# Altium PCB Avalon_PDU.PcbDoc
Units mil, origin at the board's own origin, x right, y up, seen from the top; angles counter-clockwise.
Board outline 3149.61 x 2992.13 mil, 2 copper layers (Top Layer, Bottom Layer); 22 components, 7 nets, 140 pads, 32 vias.
Unrouted connection lines stored in the file: 2.
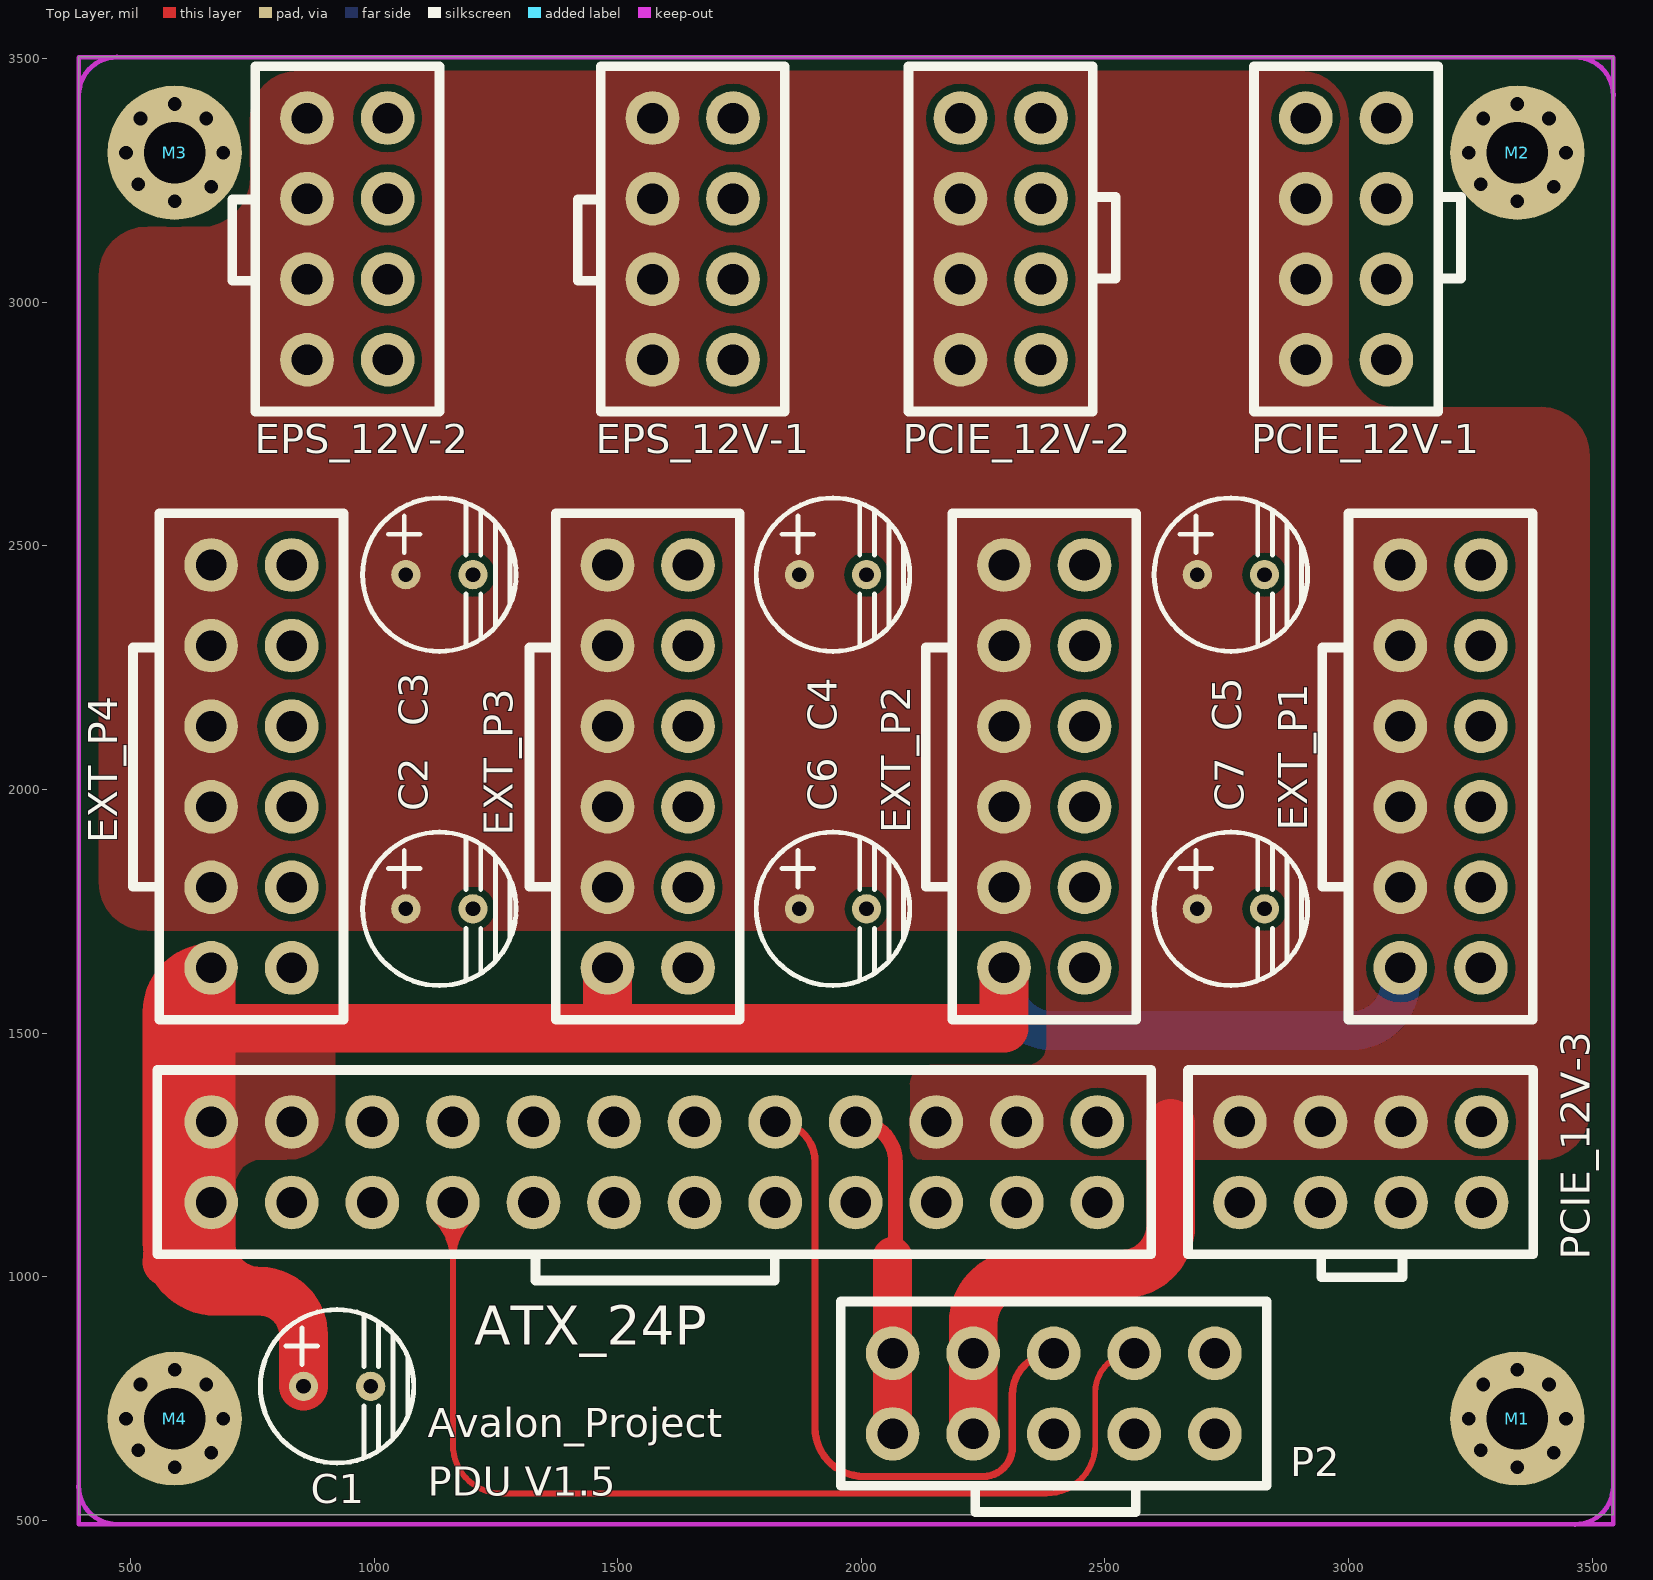
[diagram p0: Top Layer view]
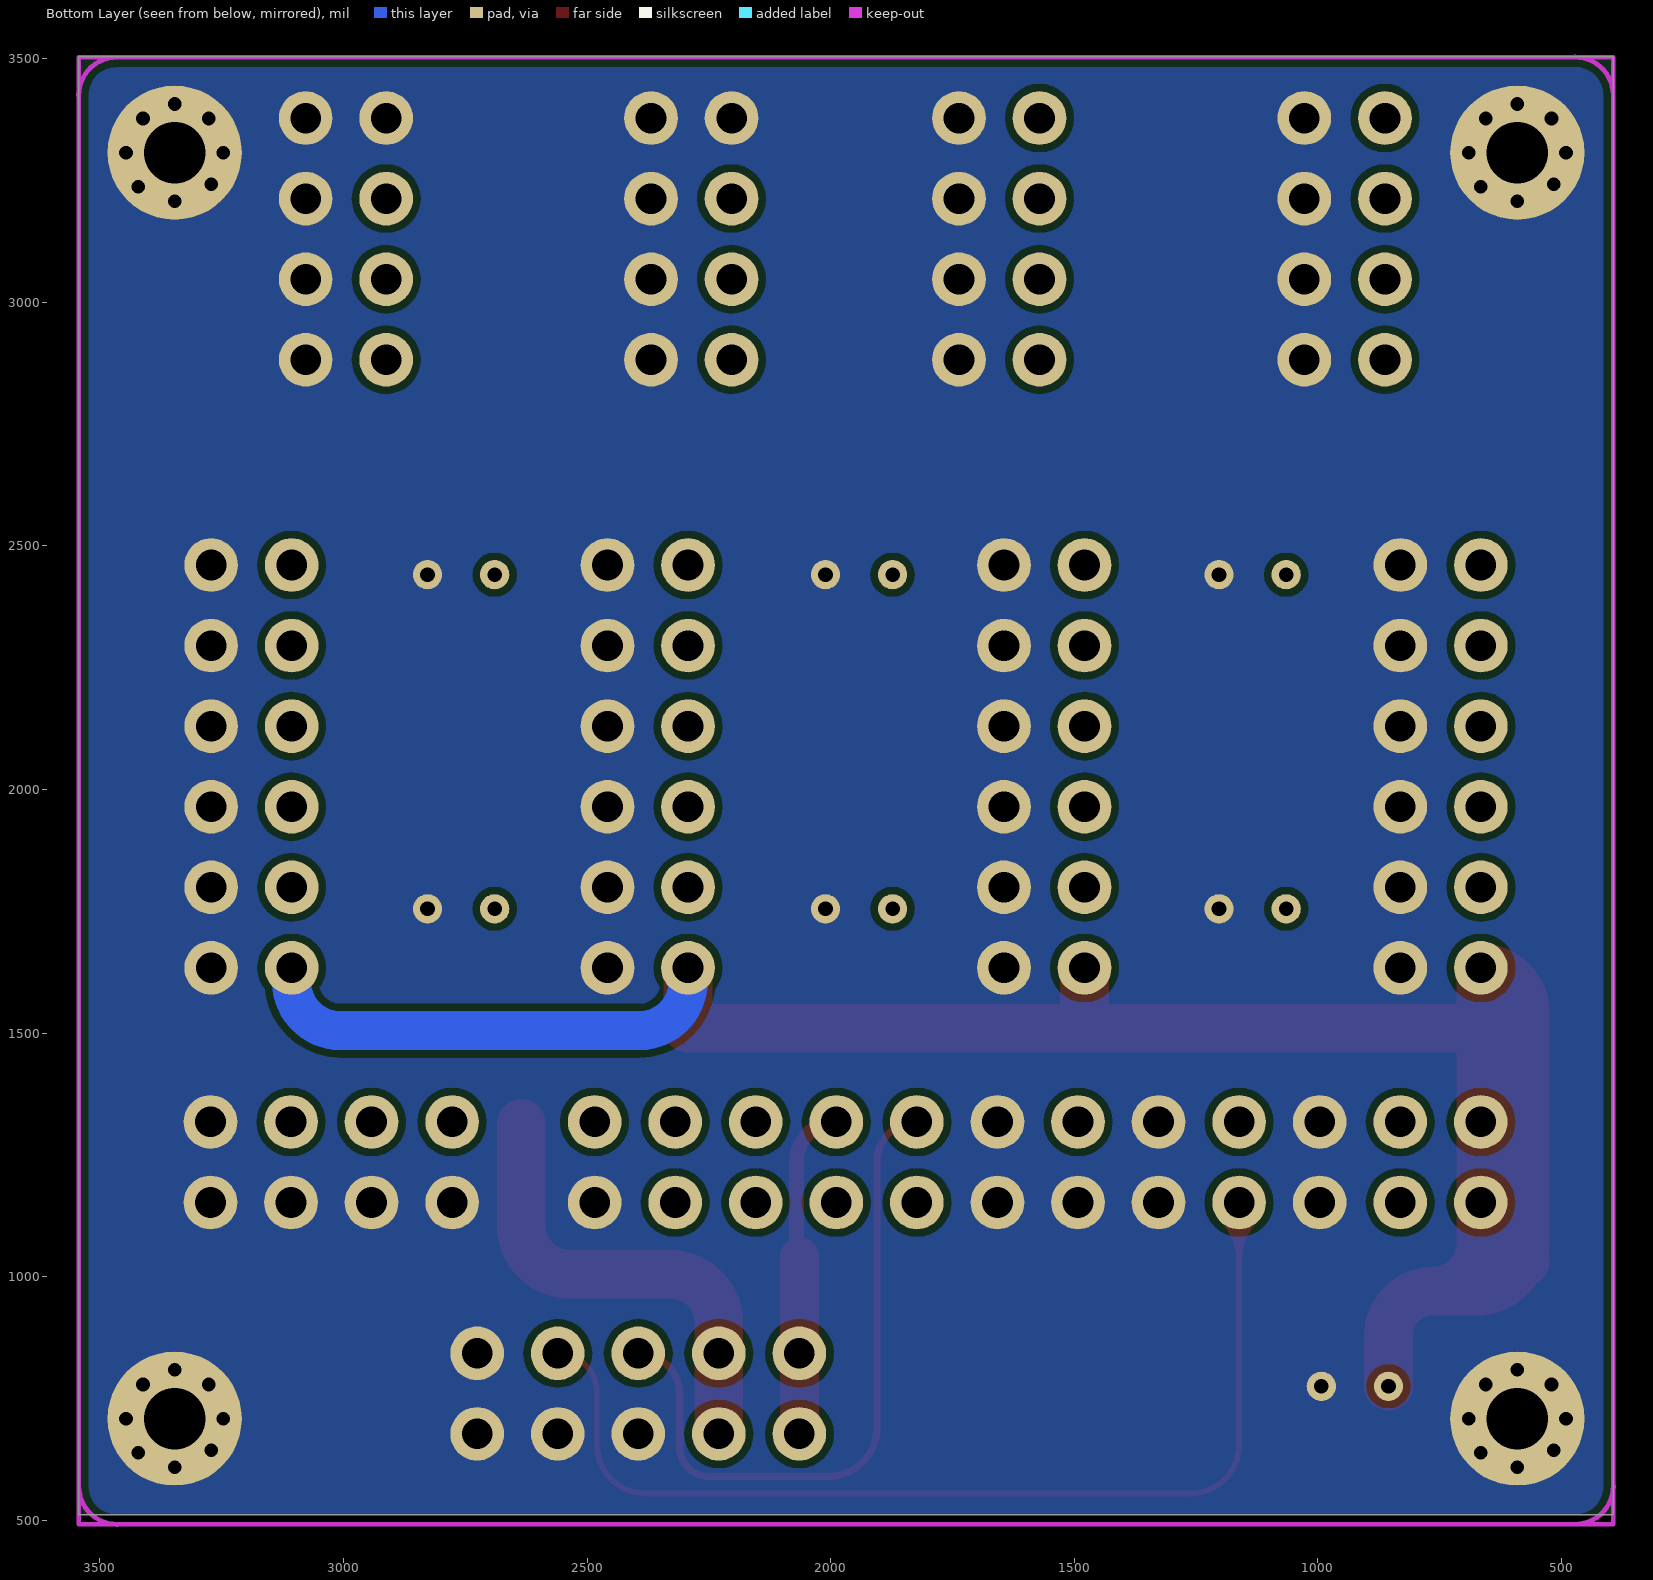
[diagram p1: Bottom Layer view, seen from below]

## Layer stack, top to bottom
Top Layer: signal copper 1.4
Dielectric: dielectric 12.6, FR-4, Dk 4.8
Bottom Layer: signal copper 1.4

## Board outline
393.7,511.81 393.7,3503.94 3543.31,3503.94 3543.31,511.81

## Design rules (kind name [scope] priority, off if disabled: settings)
Clearance Clearance_3 [InNamedPolygon('VCC12V')] p1: gap=15
Clearance Clearance_2 [InNamedPolygon('VCC3V3')] p2: gap=15
Clearance Clearance_1 [InNamedPolygon('BGND')] p3: gap=15
Clearance [All] p4: gap=10
HoleSize [All] p1: absolutevalues=TRUE maxlimit=10000 minlimit=1 maxpercent=80.000 minpercent=20.000
PolygonConnect PolygonConnect_11 [All vs IsNamedPolygon('VCC12V')] p1: connectstyle=Direct reliefconductorwidth=10 reliefentries=4 polygonreliefangle="90 Angle" airgapwidth=10
PolygonConnect PolygonConnect_10 [All vs IsNamedPolygon('VCC3V3')] p2: connectstyle=Direct reliefconductorwidth=10 reliefentries=4 polygonreliefangle="90 Angle" airgapwidth=10
PolygonConnect PolygonConnect_9 [All vs IsNamedPolygon('BGND')] p3: connectstyle=Direct reliefconductorwidth=10 reliefentries=4 polygonreliefangle="90 Angle" airgapwidth=10
PolygonConnect PolygonConnect_8 [All vs IsNamedPolygon('12V')] p4: connectstyle=Direct reliefconductorwidth=10 reliefentries=4 polygonreliefangle="90 Angle" airgapwidth=10
PolygonConnect PolygonConnect_7 [All vs IsNamedPolygon('BGND')] p5: connectstyle=Direct reliefconductorwidth=10 reliefentries=4 polygonreliefangle="90 Angle" airgapwidth=10
PolygonConnect PolygonConnect_6 [All vs IsNamedPolygon('Top Layer-12V')] p6: connectstyle=Direct reliefconductorwidth=10 reliefentries=4 polygonreliefangle="90 Angle" airgapwidth=10
PolygonConnect PolygonConnect_5 [All vs IsNamedPolygon('Top Layer-3V3')] p7: connectstyle=Direct reliefconductorwidth=10 reliefentries=4 polygonreliefangle="90 Angle" airgapwidth=10
PolygonConnect PolygonConnect_4 [All vs IsNamedPolygon('BG1')] p8: connectstyle=Direct reliefconductorwidth=10 reliefentries=4 polygonreliefangle="90 Angle" airgapwidth=10
PolygonConnect PolygonConnect_3 [All vs IsNamedPolygon('T12V')] p9: connectstyle=Direct reliefconductorwidth=10 reliefentries=4 polygonreliefangle="90 Angle" airgapwidth=10
PolygonConnect PolygonConnect_2 [All vs IsNamedPolygon('T3V3')] p10: connectstyle=Direct reliefconductorwidth=10 reliefentries=4 polygonreliefangle="90 Angle" airgapwidth=10
PolygonConnect PolygonConnect_1 [All vs IsNamedPolygon('TVSB5')] p11: connectstyle=Direct reliefconductorwidth=10 reliefentries=4 polygonreliefangle="90 Angle" airgapwidth=10
PolygonConnect [All] p12: connectstyle=Relief reliefconductorwidth=10 reliefentries=4 polygonreliefangle="90 Angle" airgapwidth=10
RoutingVias [All] p1: holewidth=28 width=50 viastyle="Through Hole" minholewidth=28 minwidth=50 maxholewidth=28 maxwidth=50
SilkscreenOverComponentPads [All] p1: minsilkscreentomaskgap=10
SolderMaskExpansion [All] p1: expansion=4
Width [All] p1: maxlimit=1000 minlimit=10 preferedwidth=10 minimp=50.000000 maximp=50.000000 favimp=50.000000
26 further rules are at their usual default settings.

## Components (designator, comment, footprint, x,y, rotation, side; value= is the part's Value field where it differs from the comment)
ATX_24P "P1" ATX_24P 1575,1235 r0 top
C1 "470uF/6V" CAP8X8 995,775 r90 top
C2 "680uF/16V" CAP8X8 1205,1755 r90 top
C3 "270uF/16V" CAP8X8 1205,2440.94 r90 top
C4 "270uF/16V" CAP8X8 2012.87,2440.94 r90 top
C5 "270uF/16V" CAP8X8 2829.65,2440.94 r90 top
C6 "680uF/16V" CAP8X8 2012.87,1755 r90 top
C7 "680uF/16V" CAP8X8 2829.65,1755 r90 top
EPS_12V-1 "P5" EPS_12V 1654.01,3130 r90 top
EPS_12V-2 "P6" EPS_12V 945,3130 r90 top
EXT_P1 "PWR_12P" PWR_12PIN 3188.98,2047.24 r270 top
EXT_P2 "PWR_12P" PWR_12PIN 2375.33,2047.24 r270 top
EXT_P3 "PWR_12P" PWR_12PIN 1561.68,2047.24 r270 top
EXT_P4 "PWR_12P" PWR_12PIN 748.03,2047.24 r270 top
M1 "Mount Hole" MHOLE2 3346.46,708.66 r0 top
M2 "Mount Hole" MHOLE2 3346.46,3307.09 r0 top
M3 "Mount Hole" MHOLE2 590.55,3307.09 r0 top
M4 "Mount Hole" MHOLE2 590.55,708.66 r0 top
P2 "Header 5X2A" PWR_10PIN 2395,760 r0 top
PCIE_12V-1 "P4" PCIE_12V_V 2995,3130 r270 top
PCIE_12V-2 "P4" PCIE_12V_V 2285.99,3130 r270 top
PCIE_12V-3 "P3" PCIE_12V_V 3025,1235 r180 top

## Footprints (in the part's own frame and the unit in brackets; to place one, negate y for a bottom-side part, rotate by r counter-clockwise, add the part's x,y. Pads: shape width x height; smd on the part's side, far side on the other; paste and mask are expansions set on the pad)
ATX_24P [mm]
  round 2.8 hole 1.6: 1(-23.1,2.1) 2(-18.9,2.1) 3(-14.7,2.1) 4(-10.5,2.1) 5(-6.3,2.1) 6(-2.1,2.1) 7(2.1,2.1) 8(6.3,2.1) 9(10.5,2.1) 10(14.7,2.1) 11(18.9,2.1) 12(23.1,2.1) 13(-23.1,-2.1) 14(-18.9,-2.1) 15(-14.7,-2.1) 16(-10.5,-2.1) 17(-6.3,-2.1) 18(-2.1,-2.1) 19(2.1,-2.1) 20(6.3,-2.1) 21(10.5,-2.1) 22(14.7,-2.1) 23(18.9,-2.1) 24(23.1,-2.1)
  silkscreen extent -25.91,-6.17 25.91,4.8, body extent -26.16,-6.43 26.16,5.05, height 13
CAP8X8 [mil]
  round 60 hole 30: 1(0,140) 2(0,2.2)
  silkscreen extent -157,-86 157,229
EPS_12V [mm]
  round 2.8 hole 1.6: 1(6.3,-2.1) 2(2.1,-2.1) 3(-2.1,-2.1) 4(-6.3,-2.1) 5(6.3,2.1) 6(2.1,2.1) 7(-2.1,2.1) 8(-6.3,2.1)
  silkscreen extent -9,-4.8 9,5.99, body extent -9,-4.8 9,4.8, height 13
MHOLE2 [mm]
  round 7 hole 3.2 unplated: 0(0,0)
PCIE_12V_V [mm]
  round 2.8 hole 1.6: 1(6.3,-2.1) 2(2.1,-2.1) 3(-2.1,-2.1) 4(-6.3,-2.1) 5(6.3,2.1) 6(2.1,2.1) 7(-2.1,2.1) 8(-6.3,2.1)
  silkscreen extent -9,-4.8 9,5.99, body extent -9,-4.8 9,4.8, height 13
PWR_10PIN [mm]
  round 2.8 hole 1.6: 1(-8.402,2.1) 2(-4.202,2.1) 3(-0.002,2.1) 4(4.198,2.1) 5(8.398,2.1) 6(-8.402,-2.1) 7(-4.202,-2.1) 8(-0.002,-2.1) 9(4.198,-2.1) 10(8.398,-2.1)
  silkscreen extent -11.1,-6.17 11.1,4.8, body extent -11.1,-4.8 11.1,4.8, height 13
PWR_12PIN [mm]
  round 2.8 hole 1.6: 1(-10.5,2.1) 2(-6.3,2.1) 3(-2.1,2.1) 4(2.1,2.1) 5(6.3,2.1) 6(10.5,2.1) 7(-10.5,-2.1) 8(-6.3,-2.1) 9(-2.1,-2.1) 10(2.1,-2.1) 11(6.3,-2.1) 12(10.5,-2.1)
  silkscreen extent -13.2,-6.17 13.2,4.8, body extent -13.2,-4.8 13.2,4.8, height 13

## Part data
ATX_24P: library part ATX_24P
C1 C2 C3 C4 C5 C6 C7: library part "Cap Pol3", "Polarized Capacitor (Surface Mount)"
EPS_12V-1 EPS_12V-2: library part EPS_12V
M1 M2 M3 M4: library part M_Hole
P2: "Header, 5-Pin, Dual row"
PCIE_12V-1 PCIE_12V-2 PCIE_12V-3: library part PCIE_12V

## Via types
v1: diameter 50, hole 28, Top Layer to Bottom Layer, 32 vias

## Nets (pads, with @x,y where several pads share a name; then routed paths per layer and width w, separated by ;. In a path a pad name is that pad's centre, name@x,y a point inside that pad or via, vN(x,y) a via of type N, cw(c..) or ccw(c..) an arc to the next point about the centre after c; other vN are vias at no path point)
5VSB: ATX_24P.9 P2.1 P2.6 | length 681.1
  Top Layer w30: ATX_24P.9 cw(c1988.39,1236.06) 2070,1236.06 2070,1047.2
  Top Layer w80: P2.6 P2.1 2064.2,1041.4
GND: ATX_24P.3 ATX_24P.5 ATX_24P.7 ATX_24P.15 ATX_24P.17 ATX_24P.18 ATX_24P.19 ATX_24P.24 C1.2 C2.2 C3.2 C4.2 C5.2 C6.2 C7.2 EPS_12V-1.1 EPS_12V-1.2 EPS_12V-1.3 EPS_12V-1.4 EPS_12V-2.1 EPS_12V-2.2 EPS_12V-2.3 EPS_12V-2.4 EXT_P1.1 EXT_P1.2 EXT_P1.3 EXT_P1.4 EXT_P1.5 EXT_P1.6 EXT_P2.1 EXT_P2.2 EXT_P2.3 EXT_P2.4 EXT_P2.5 EXT_P2.6 EXT_P3.1 EXT_P3.2 EXT_P3.3 EXT_P3.4 EXT_P3.5 EXT_P3.6 EXT_P4.1 EXT_P4.2 EXT_P4.3 EXT_P4.4 EXT_P4.5 EXT_P4.6 M1.0 M2.0 M3.0 M4.0 P2.5 P2.8 P2.9 P2.10 PCIE_12V-1.4 PCIE_12V-1.5 PCIE_12V-1.6 PCIE_12V-1.7 PCIE_12V-1.8 PCIE_12V-2.4 PCIE_12V-2.5 PCIE_12V-2.6 PCIE_12V-2.7 PCIE_12V-2.8 PCIE_12V-3.4 PCIE_12V-3.5 PCIE_12V-3.6 PCIE_12V-3.7 PCIE_12V-3.8
  other v1: 590.55,608.66 3346.46,608.66 665.55,638.66 3421.46,638.66 515.55,643.66 3271.46,643.66 490.55,708.66 690.55,708.66 3246.46,708.66 3446.46,708.66 520.55,778.66 655.55,778.66 3276.46,778.66 3411.46,778.66 590.55,808.66 3346.46,808.66 590.55,3207.09 3346.46,3207.09 665.55,3237.09 3421.46,3237.09 515.55,3242.09 3271.46,3242.09 490.55,3307.09 690.55,3307.09 3246.46,3307.09 3446.46,3307.09 520.55,3377.09 655.55,3377.09 3276.46,3377.09 3411.46,3377.09 590.55,3407.09 3346.46,3407.09
PG: ATX_24P.8 P2.3 | length 1411.9
  Top Layer w15: ATX_24P.8 cw(c1823.03,1235.71) 1905,1235.71 1905,690 ccw(c2005,690) 2005,590 2250,590 ccw(c2250,650) 2310,650 2310,757.77 cw(c2394.91,757.77) P2.3
PSON#: ATX_24P.16 P2.4 | length 2585.6
  Top Layer w12: ATX_24P.16@1126.88,1117.59 cw(c1043.03,1033.74) 1161.61,1033.74 cw(c1280.2,1033.74) ATX_24P.16@1196.35,1117.59 ; ATX_24P.16@1135.37,1126.08 cw(c1072,1062.71) 1161.61,1062.71 cw(c1251.23,1062.71) ATX_24P.16@1187.86,1126.08 ; ATX_24P.16@1143.85,1134.56 cw(c1100.97,1091.68) 1161.61,1091.68 cw(c1222.25,1091.68) ATX_24P.16@1179.38,1134.56 ; ATX_24P.16 1161.61,655 ccw(c1261.61,655) 1261.61,555 2380,555 ccw(c2380,655) 2480,655 2480,762.42 cw(c2560.26,762.42) P2.4
VCC3V3: ATX_24P.1 ATX_24P.2 ATX_24P.13 C1.1 EXT_P1.12 EXT_P2.12 EXT_P3.12 EXT_P4.12 | length 5574.7
  Top Layer w100: 575,1029.95 cw(c695.98,1029.95) ATX_24P.13@666.79,1147.36 ; 575,1086.71 cw(c896.52,1086.71) ATX_24P.1@669.17,1314.06 ; 575,1383.29 ccw(c896.52,1383.29) ATX_24P.13@669.17,1155.94 ; ATX_24P.1@669.11,1321.35 cw(c884.22,1543.49) 575,1543.49 ; C1.1 855,880 ccw(c765,880) 765,970 ; EXT_P3.12 1479,1510 ; EXT_P2.12 2292.65,1510 1479,1510 ; 575,1543.5 cw(c665.35,1543.5) EXT_P4.12 665.35,1510 ; 575,1543.5 575,1070 ccw(c675,1070) 675,970 765,970 ; 665.35,1510 665.35,1069.65 ccw(c765,1069.65) 765,970 ; 665.35,1510 1479,1510
  Bottom Layer w80: EXT_P2.12 2292.65,1605 ccw(c2392.65,1605) 2392.65,1505 3006.3,1505 ccw(c3006.3,1605) EXT_P1.12@3106.3,1605
VCC5V: ATX_24P.21 ATX_24P.22 ATX_24P.23
VCC12V: ATX_24P.10 ATX_24P.11 C2.1 C3.1 C4.1 C5.1 C6.1 C7.1 EPS_12V-1.5 EPS_12V-1.6 EPS_12V-1.7 EPS_12V-1.8 EPS_12V-2.5 EPS_12V-2.6 EPS_12V-2.7 EPS_12V-2.8 EXT_P1.7 EXT_P1.8 EXT_P1.9 EXT_P1.10 EXT_P1.11 EXT_P2.7 EXT_P2.8 EXT_P2.9 EXT_P2.10 EXT_P2.11 EXT_P3.7 EXT_P3.8 EXT_P3.9 EXT_P3.10 EXT_P3.11 EXT_P4.7 EXT_P4.8 EXT_P4.9 EXT_P4.10 EXT_P4.11 P2.2 P2.7 PCIE_12V-1.1 PCIE_12V-1.2 PCIE_12V-1.3 PCIE_12V-2.1 PCIE_12V-2.2 PCIE_12V-2.3 PCIE_12V-3.1 PCIE_12V-3.2 PCIE_12V-3.3 | length 957.3
  Top Layer w100: P2.7 P2.2 2229.55,905 cw(c2329.55,905) 2329.55,1005 2535,1005 ccw(c2535,1105) 2635,1105 2635,1315
pads on no net: ATX_24P.4 ATX_24P.6 ATX_24P.12 ATX_24P.14 ATX_24P.20

## Polygon pours and split planes (outlines as drawn)
GND on Bottom Layer "BGND" (solid, pour order 10): 3543.31,511.81 3543.31,3503 393.7,3503 393.7,511.81 3543.31,511.81
VCC12V on Top Layer "VCC12V" (solid, pour order 13): 970,3475 845,3475 ccw(c845,3375) 745,3375 745,3300 745,3255 cw(c645,3255) 645,3155 590,3155 535,3155 ccw(c535,3055) 435,3055 435,2605 435,1810 ccw(c535,1810) 535,1710 905,1710 2290,1710 cw(c2290,1620) 2380,1620 2380,1475 cw(c2340,1475) 2340,1435 2200,1435 2140,1435 ccw(c2140,1395) 2100,1395 2100,1265 ccw(c2125,1265) 2125,1240 3395,1240 ccw(c3395,1340) 3495,1340 3495,1660 3495,2685 ccw(c3395,2685) 3395,2785 3165,2785 3100,2785 cw(c3100,2885) 3000,2885 3000,3375 ccw(c2900,3375) 2900,3475 970,3475
VCC3V3 on Top Layer "VCC3V3" (solid, pour order 5): 920,1480 920,1340 cw(c820,1340) 820,1240 770,1240 ccw(c770,1185) 715,1185 715,1020 670,1020 cw(c670,1060) 630,1060 630,1480 920,1480

## Keep-outs
Keep-Out Layer:
  lines w10: 393.41,570.54 ccw(c472.15,570.54) 472.15,491.8 ; 393.69,3424.55 cw(c472.43,3424.55) 472.43,3503.29 ; 3464.57,491.52 ccw(c3464.57,570.26) 3543.32,570.26 ; 3464.86,3503.01 cw(c3464.86,3424.27) 3543.6,3424.27 ; 393.7,491.81 393.7,3503 3543.31,3503 3543.31,491.81 393.7,491.81

## Silkscreen, mask and mechanical layers (free items; w line width, h text height)
Top Overlay:
  text "Avalon_Project" at 1110,670 h60
  text "PDU V1.5" at 1110,550 h60